# Altium PCB PCB1.PcbDoc
Units mm, origin at the board's own origin, x right, y up, seen from the top; angles counter-clockwise.
Board outline 40 x 99 mm, 2 copper layers (Top Layer, Bottom Layer), stack 1.57 mm thick; 71 components, 47 nets, 155 pads, 6 vias.
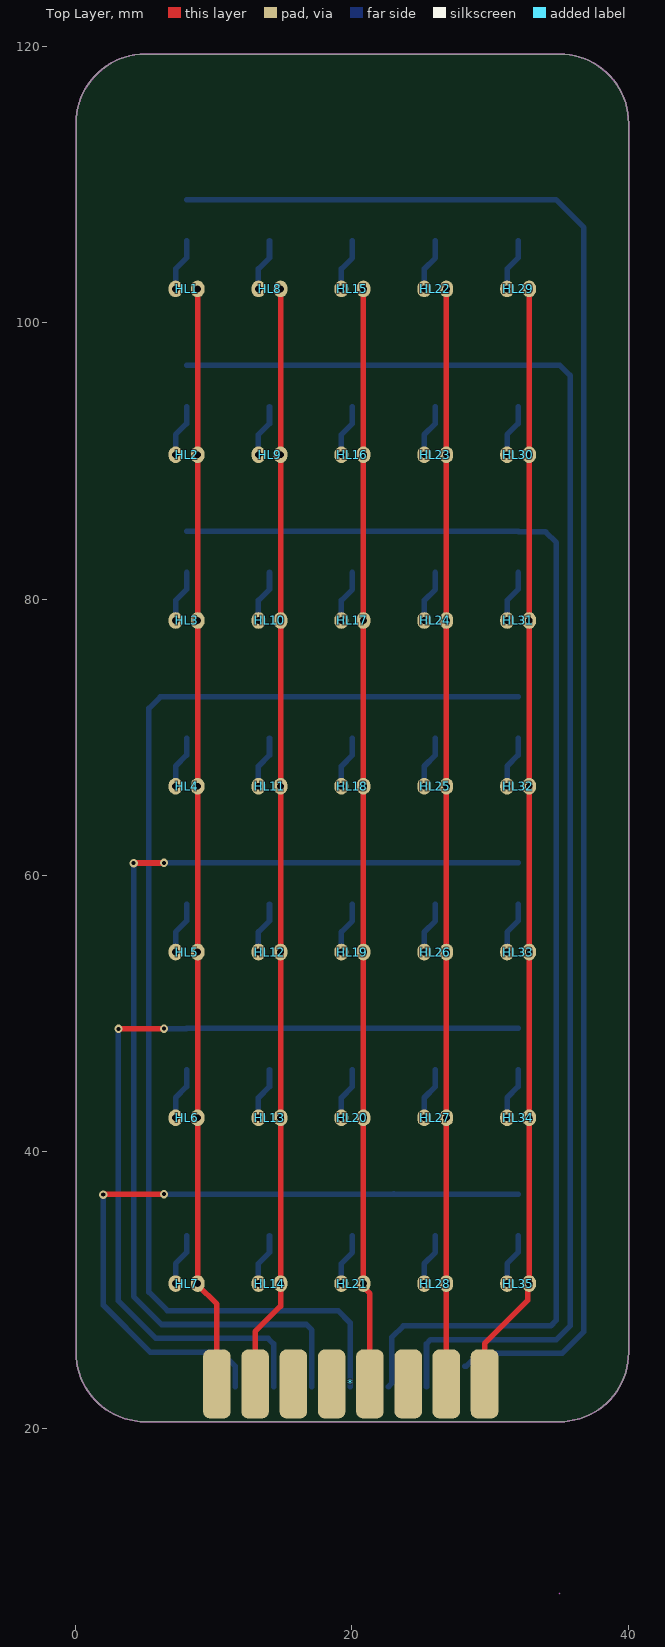
[diagram p0: Top Layer view]
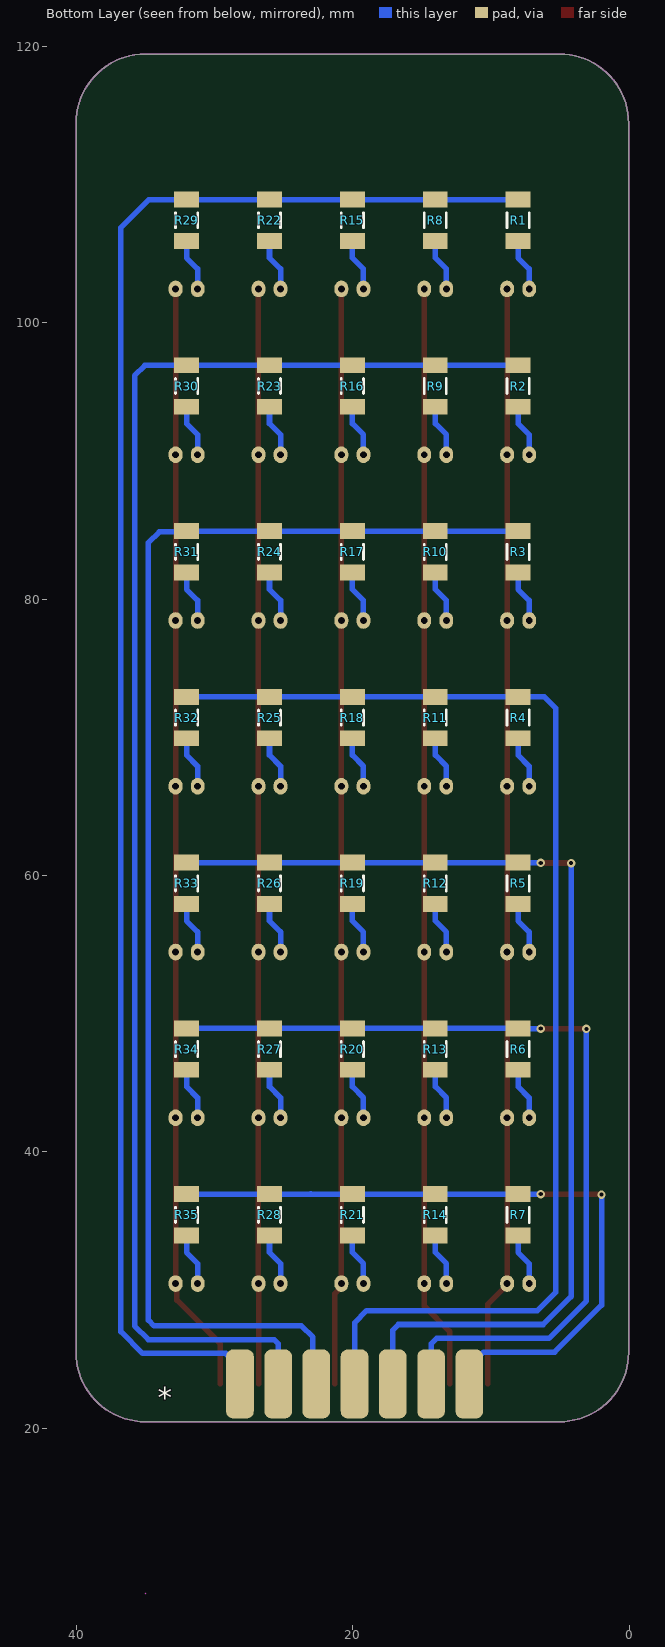
[diagram p1: Bottom Layer view, seen from below]
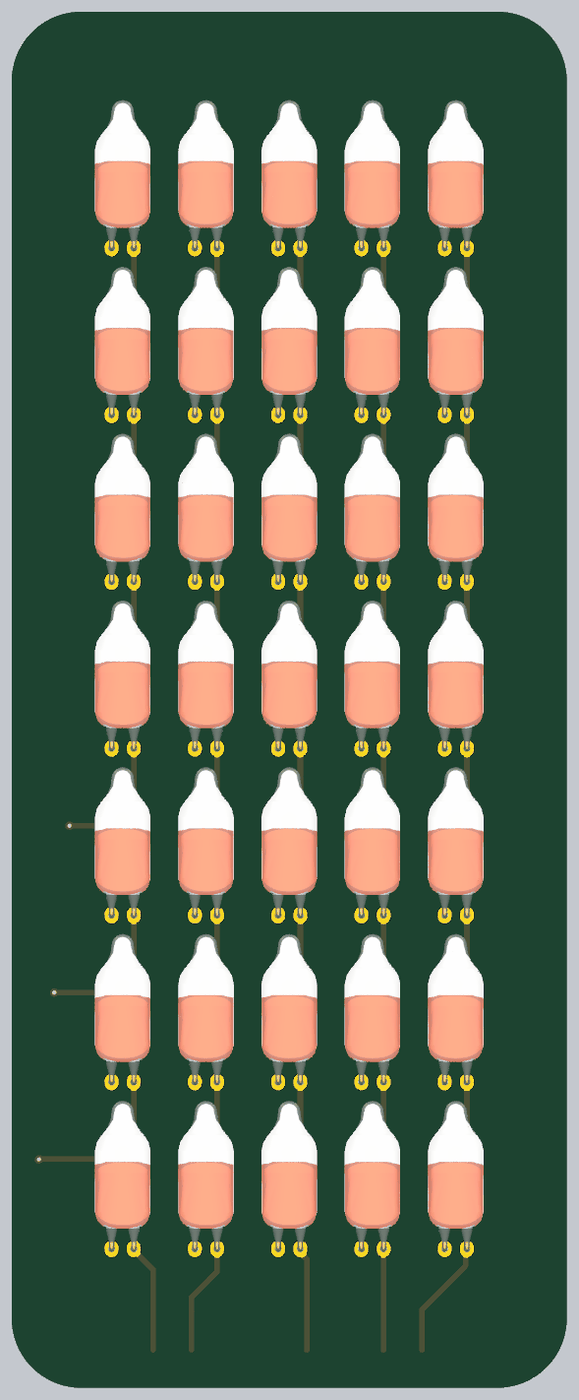
[diagram p2: 3D render of the assembled board from above, using the file's embedded part models]
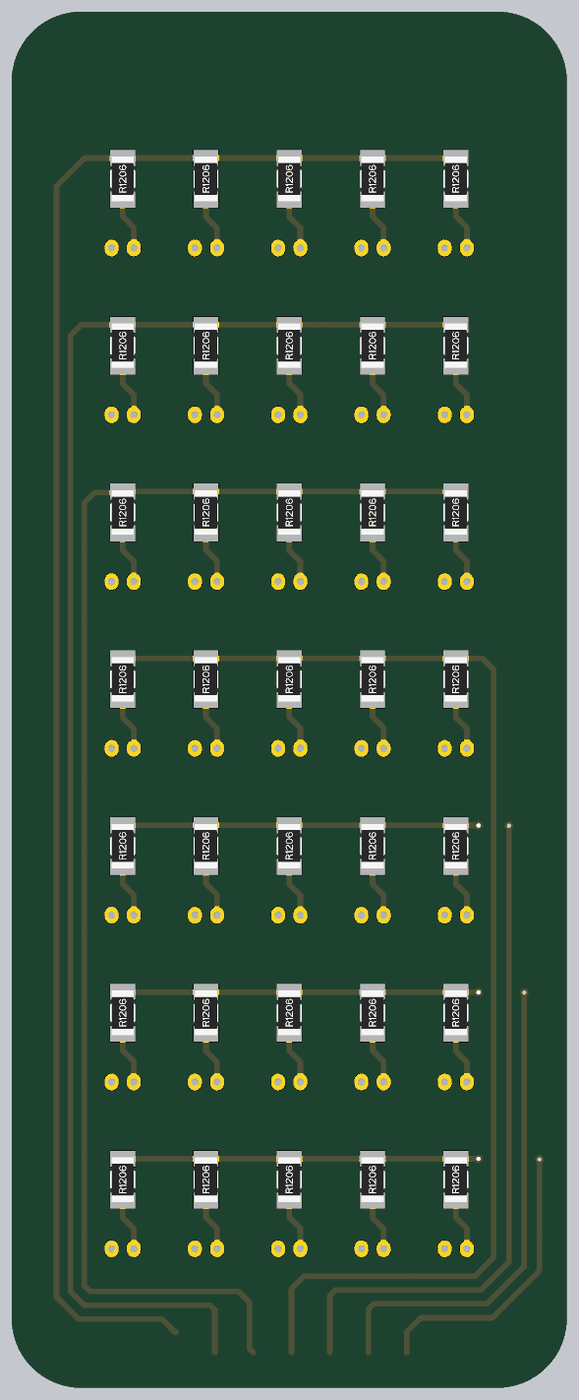
[diagram p3: 3D render of the assembled board from below, using the file's embedded part models]

## Layer stack, top to bottom
Top Solder: solder mask 0.0102, Solder Resist, Dk 3.5
Top Layer: signal copper 0.0356
Dielectric 1: core 1.4986, Core-043, Dk 4.3
Bottom Layer: signal copper 0.0356
Bottom Solder: solder mask 0.0102, Solder Resist, Dk 3.5

## Board outline
5.036,20.464 cw(c5.036,25.464) 0.036,25.464 0.036,114.464 cw(c5.036,114.464) 5.036,119.464 35.036,119.464 cw(c35.036,114.464) 40.036,114.464 40.036,25.464 cw(c35.036,25.464) 35.036,20.464

## Design rules (kind name [scope] priority, off if disabled: settings)
AcuteAngle [All] p1: minimum=6.00000000000000E+0001 checktracksonly=TRUE
Clearance [All] p1: gap=0.6 ignorepadtopadclearanceinfootprint=TRUE except(0.127: Arc-Track Track-Track Track-SMDPad Track-THPad Track-Via Track-Fill Track-Poly Track-Region Track-Text Track-Hole)
DiffPairsRouting [All] p1: maxlimit=0.254 minlimit=0.254 mostfreqgap=0.254 toplayer_minwidth=0.1 toplayer_maxwidth=0.3 toplayer_prefwidth=0.2 bottomlayer_minwidth=0.1 bottomlayer_maxwidth=0.3 bottomlayer_prefwidth=0.2 maxuncoupledlength=12.7
HoleSize [All] p1: absolutevalues=TRUE maxlimit=6.35 minlimit=0.203 maxpercent=80.000 minpercent=20.000
MinimumAnnularRing [All] p1: minimumring=0.13
MinimumSolderMaskSliver [All] p1: minsoldermaskwidth=0.1
PolygonConnect PolygonConnect_6 [All vs IsNamedPolygon('NETDD1_1_L01_P035')] p1: connectstyle=Direct reliefconductorwidth=0.254 reliefentries=4 polygonreliefangle="90 Angle" airgapwidth=0.254
PolygonConnect PolygonConnect_5 [All vs IsNamedPolygon('NETDD1_3_L01_P034')] p2: connectstyle=Direct reliefconductorwidth=0.254 reliefentries=4 polygonreliefangle="90 Angle" airgapwidth=0.254
PolygonConnect PolygonConnect_4 [All vs IsNamedPolygon('NETDD1_3_L01_P034')] p3: connectstyle=Direct reliefconductorwidth=0.254 reliefentries=4 polygonreliefangle="90 Angle" airgapwidth=0.254
PolygonConnect PolygonConnect_3 [All vs IsNamedPolygon('NETDD1_3_L01_P034')] p4: connectstyle=Direct reliefconductorwidth=0.254 reliefentries=4 polygonreliefangle="90 Angle" airgapwidth=0.254
PolygonConnect PolygonConnect_2 [All vs IsNamedPolygon('NETDD1_3_L01_P027')] p5: connectstyle=Direct reliefconductorwidth=0.254 reliefentries=4 polygonreliefangle="90 Angle" airgapwidth=0.254
PolygonConnect PolygonConnect_1 [All vs IsNamedPolygon('NETDD1_3_L01_P027')] p6: connectstyle=Direct reliefconductorwidth=0.254 reliefentries=2 polygonreliefangle="90 Angle" airgapwidth=0.254
PolygonConnect [All] p7: connectstyle=Relief reliefconductorwidth=0.254 reliefentries=4 polygonreliefangle="90 Angle" airgapwidth=0.254
RoutingVias [All] p1: holewidth=0.406 width=0.813 viastyle="Through Hole" minholewidth=0.254 minwidth=0.457 maxholewidth=5.08 maxwidth=7.62
SilkToSolderMaskClearance [IsPad] p1: minsilkscreentomaskgap=0.152 clearancetoexposedcopper=TRUE
SolderMaskExpansion [All] p1: expansion=0.05 istentingtop=FALSE
UnpouredPolygon [All] p1: allowunpoured=TRUE
Width [All] p1: maxlimit=25.4 minlimit=0.102 preferedwidth=0.203
25 further rules are at their usual default settings.

## Components (designator, comment, footprint, x,y, rotation, side; value= is the part's Value field where it differs from the comment)
* "Component_1" "DB-15 on PCB" 20,8.7 r0 top
HL1 "ne-2" ne2-4x10 8.036,102.464 r0 top
HL2 "ne-2" ne2-4x10 8.036,90.464 r0 top
HL3 "ne-2" ne2-4x10 8.036,78.464 r0 top
HL4 "ne-2" ne2-4x10 8.036,66.464 r0 top
HL5 "ne-2" ne2-4x10 8.036,54.464 r0 top
HL6 "ne-2" ne2-4x10 8.036,42.464 r0 top
HL7 "ne-2" ne2-4x10 8.036,30.464 r0 top
HL8 "ne-2" ne2-4x10 14.036,102.464 r0 top
HL9 "ne-2" ne2-4x10 14.036,90.464 r0 top
HL10 "ne-2" ne2-4x10 14.036,78.464 r0 top
HL11 "ne-2" ne2-4x10 14.036,66.464 r0 top
HL12 "ne-2" ne2-4x10 14.036,54.464 r0 top
HL13 "ne-2" ne2-4x10 14.036,42.464 r0 top
HL14 "ne-2" ne2-4x10 14.036,30.464 r0 top
HL15 "ne-2" ne2-4x10 20.036,102.464 r0 top
HL16 "ne-2" ne2-4x10 20.036,90.464 r0 top
HL17 "ne-2" ne2-4x10 20.036,78.464 r0 top
HL18 "ne-2" ne2-4x10 20.036,66.464 r0 top
HL19 "ne-2" ne2-4x10 20.036,54.464 r0 top
HL20 "ne-2" ne2-4x10 20.036,42.464 r0 top
HL21 "ne-2" ne2-4x10 20.036,30.464 r0 top
HL22 "ne-2" ne2-4x10 26.036,102.464 r0 top
HL23 "ne-2" ne2-4x10 26.036,90.464 r0 top
HL24 "ne-2" ne2-4x10 26.036,78.464 r0 top
HL25 "ne-2" ne2-4x10 26.036,66.464 r0 top
HL26 "ne-2" ne2-4x10 26.036,54.464 r0 top
HL27 "ne-2" ne2-4x10 26.036,42.464 r0 top
HL28 "ne-2" ne2-4x10 26.036,30.464 r0 top
HL29 "ne-2" ne2-4x10 32.036,102.464 r0 top
HL30 "ne-2" ne2-4x10 32.036,90.464 r0 top
HL31 "ne-2" ne2-4x10 32.036,78.464 r0 top
HL32 "ne-2" ne2-4x10 32.036,66.464 r0 top
HL33 "ne-2" ne2-4x10 32.036,54.464 r0 top
HL34 "ne-2" ne2-4x10 32.036,42.464 r0 top
HL35 "ne-2" ne2-4x10 32.036,30.464 r0 top
R1 "R-1206 0,25 Вт 510kОм Yageo" R1206 8.036,107.439 r90 bottom
R2 "R-1206 0,25 Вт 510kОм Yageo" R1206 8.036,95.439 r90 bottom
R3 "R-1206 0,25 Вт 510kОм Yageo" R1206 8.036,83.439 r90 bottom
R4 "R-1206 0,25 Вт 510kОм Yageo" R1206 8.036,71.439 r90 bottom
R5 "R-1206 0,25 Вт 510kОм Yageo" R1206 8.036,59.439 r90 bottom
R6 "R-1206 0,25 Вт 510kОм Yageo" R1206 8.036,47.439 r90 bottom
R7 "R-1206 0,25 Вт 510kОм Yageo" R1206 8.036,35.439 r90 bottom
R8 "R-1206 0,25 Вт 510kОм Yageo" R1206 14.036,107.439 r90 bottom
R9 "R-1206 0,25 Вт 510kОм Yageo" R1206 14.036,95.439 r90 bottom
R10 "R-1206 0,25 Вт 510kОм Yageo" R1206 14.036,83.439 r90 bottom
R11 "R-1206 0,25 Вт 510kОм Yageo" R1206 14.036,71.439 r90 bottom
R12 "R-1206 0,25 Вт 510kОм Yageo" R1206 14.036,59.439 r90 bottom
R13 "R-1206 0,25 Вт 510kОм Yageo" R1206 14.036,47.439 r90 bottom
R14 "R-1206 0,25 Вт 510kОм Yageo" R1206 14.036,35.439 r90 bottom
R15 "R-1206 0,25 Вт 510kОм Yageo" R1206 20.036,107.439 r90 bottom
R16 "R-1206 0,25 Вт 510kОм Yageo" R1206 20.036,95.439 r90 bottom
R17 "R-1206 0,25 Вт 510kОм Yageo" R1206 20.036,83.439 r90 bottom
R18 "R-1206 0,25 Вт 510kОм Yageo" R1206 20.036,71.439 r90 bottom
R19 "R-1206 0,25 Вт 510kОм Yageo" R1206 20.036,59.439 r90 bottom
R20 "R-1206 0,25 Вт 510kОм Yageo" R1206 20.036,47.439 r90 bottom
R21 "R-1206 0,25 Вт 510kОм Yageo" R1206 20.036,35.439 r90 bottom
R22 "R-1206 0,25 Вт 510kОм Yageo" R1206 26.036,107.439 r90 bottom
R23 "R-1206 0,25 Вт 510kОм Yageo" R1206 26.036,95.439 r90 bottom
R24 "R-1206 0,25 Вт 510kОм Yageo" R1206 26.036,83.439 r90 bottom
R25 "R-1206 0,25 Вт 510kОм Yageo" R1206 26.036,71.439 r90 bottom
R26 "R-1206 0,25 Вт 510kОм Yageo" R1206 26.036,59.439 r90 bottom
R27 "R-1206 0,25 Вт 510kОм Yageo" R1206 26.036,47.439 r90 bottom
R28 "R-1206 0,25 Вт 510kОм Yageo" R1206 26.036,35.439 r90 bottom
R29 "R-1206 0,25 Вт 510kОм Yageo" R1206 32.036,107.439 r90 bottom
R30 "R-1206 0,25 Вт 510kОм Yageo" R1206 32.036,95.439 r90 bottom
R31 "R-1206 0,25 Вт 510kОм Yageo" R1206 32.036,83.439 r90 bottom
R32 "R-1206 0,25 Вт 510kОм Yageo" R1206 32.036,71.439 r90 bottom
R33 "R-1206 0,25 Вт 510kОм Yageo" R1206 32.036,59.439 r90 bottom
R34 "R-1206 0,25 Вт 510kОм Yageo" R1206 32.036,47.439 r90 bottom
R35 "R-1206 0,25 Вт 510kОм Yageo" R1206 32.036,35.439 r90 bottom

## Footprints (in the part's own frame and the unit in brackets; to place one, negate y for a bottom-side part, rotate by r counter-clockwise, add the part's x,y. Pads: shape width x height; smd on the part's side, far side on the other; paste and mask are expansions set on the pad)
"DB-15 on PCB" [mm]
  rrect50% 2x5 smd: 1(9.6,14.5) 2(6.825,14.5) 3(4.075,14.5) 4(1.305,14.5) 5(-1.465,14.5) 6(-4.235,14.5) 7(-7.005,14.5) 8(-9.775,14.5)
  rrect50% 2x5 smd far side: 9(8.175,14.5) 10(5.4,14.5) 11(2.65,14.5) 12(-0.12,14.5) 13(-2.89,14.5) 14(-5.66,14.5) 15(-8.43,14.5)
  body extent -19.6,0 19.6,14.9, height 5.45
ne2-4x10 [mm]
  oval 1x1.2 hole 0.5: 1(-0.8,0) 2(0.8,0)
  body extent -2,-0.22 2,10.65, height 4.22
R1206 [mm] "Chip Resistor, Body 3.2x1.6mm, Height 1.7mm"
  rect 1.15x1.8 smd: 1(-1.5,0) 2(1.5,0)
  silkscreen extent -0.55,-0.8 0.55,0.8, body extent -1.6,-0.8 1.6,0.8, height 0.6

## Part data
HL1 HL2 HL3 HL4 HL5 HL6 HL7 HL8 HL9 HL10 HL11 HL12 HL13 HL14 HL15 HL16 HL17 HL18 HL19 HL20 HL21 HL22 HL23 HL24 HL25 HL26 HL27 HL28 HL29 HL30 HL31 HL32 HL33 HL34 HL35: "Neon Bulb Indicator Lamps 4mm Red", Current="0,3 mA", Package=4x10, Name="Neon lamp"
R1 R2 R3 R4 R5 R6 R7 R8 R9 R10 R11 R12 R13 R14 R15 R16 R17 R18 R19 R20 R21 R22 R23 R24 R25 R26 R27 R28 R29 R30 R31 R32 R33 R34 R35: library part R1206, Manufacturer=Yageo, Package=R-1206, Power="0,25 Вт", Resistance=510k, Tolerance=5%, Name=Resistor

## Via types
v1: diameter 0.6, hole 0.3, Top Layer to Bottom Layer, tented both sides, 6 vias

## Nets (pads, with @x,y where several pads share a name; then routed paths per layer and width w, separated by ;. In a path a pad name is that pad's centre, name@x,y a point inside that pad or via, vN(x,y) a via of type N, cw(c..) or ccw(c..) an arc to the next point about the centre after c; other vN are vias at no path point)
1: *.8 HL1.2 HL2.2 HL3.2 HL4.2 HL5.2 HL6.2 HL7.2 | length 79.8
  Top Layer w0.4: HL1.2 HL2.2 HL3.2 HL4.2 HL5.2 HL6.2 HL7.2 8.836,30.364 10.225,28.975 *.8
2: *.7 HL8.2 HL9.2 HL10.2 HL11.2 HL12.2 HL13.2 HL14.2 | length 80
  Top Layer w0.4: *.7 12.995,26.995 14.836,28.836 HL14.2 HL13.2 HL12.2 HL11.2 HL10.2 HL9.2 HL8.2
3: *.4 HL15.2 HL16.2 HL17.2 HL18.2 HL19.2 HL20.2 HL21.2 | length 79.5
  Top Layer w0.4: HL15.2 HL16.2 HL17.2 HL18.2 HL19.2 HL20.2 20.836,30.202 21.305,29.733 *.4
4: *.2 HL22.2 HL23.2 HL24.2 HL25.2 HL26.2 HL27.2 HL28.2 | length 79.3
  Top Layer w0.4: *.2 26.83,23.205 26.83,30.459 HL28.2 HL27.2 HL26.2 HL25.2 HL24.2 HL23.2 HL22.2
5: *.1 HL29.2 HL30.2 HL31.2 HL32.2 HL33.2 HL34.2 HL35.2 | length 80.6
  Top Layer w0.4: *.1 29.6,26.122 32.743,29.264 32.743,30.372 HL35.2 HL34.2 HL33.2 HL32.2 HL31.2 HL30.2 HL29.2
A: *.9 R1.2 R8.2 R15.2 R22.2 R29.2 | length 119.2
  Bottom Layer w0.4: R1.2 R8.2 R15.2 R22.2 R29.2 34.761,108.939 36.8,106.9 36.8,26.983 35.221,25.404 29.214,25.404 28.275,24.466 *.9@28.175,24.466
B: *.10 R2.2 R9.2 R16.2 R23.2 R30.2 | length 110.9
  Bottom Layer w0.4: R2.2 R9.2 R16.2 R23.2 R30.2 35.061,96.939 35.8,96.2 35.8,27.397 34.807,26.404 25.704,26.404 25.4,26.1 *.10@25.4,23
C: *.11 R3.2 R10.2 R17.2 R24.2 R31.2 | length 99.5
  Bottom Layer w0.4: R3.2 R10.2 R17.2 R24.2 R31.2 32.088,84.886 34.014,84.886 34.8,84.1 34.8,27.811 34.393,27.404 23.724,27.404 22.9,26.58 22.9,23.25 *.11@22.65,23
D: *.12 R4.2 R11.2 R18.2 R25.2 R32.2 | length 89.5
  Bottom Layer w0.4: *.12@19.88,23 19.88,27.62 19,28.5 6.643,28.5 5.3,29.843 5.3,72.1 6.139,72.939 R4.2 R11.2 R18.2 R25.2 R32.2
E: *.13 R5.2 R12.2 R19.2 R26.2 R33.2 | length 77.2
  Top Layer w0.4: v1(4.2,60.9) 4.21,60.91 6.39,60.91 v1(6.4,60.919)
  Bottom Layer w0.4: v1(4.2,60.9) 4.2,29.528 6.228,27.5 16.7,27.5 17.11,27.09 *.13@17.11,23 ; v1(6.4,60.919) 8.016,60.919 R5.2 R12.2 R19.2 R26.2 R33.2
F: *.14 R6.2 R13.2 R20.2 R27.2 R34.2 | length 64.3
  Top Layer w0.4: v1(3.1,48.9) 6.381,48.9 v1(6.4,48.919)
  Bottom Layer w0.4: v1(3.1,48.9) 3.1,29.214 5.814,26.5 13.94,26.5 14.34,26.1 *.14@14.34,23 ; v1(6.4,48.919) 8.016,48.919 R6.2 R13.2 R20.2 R27.2 R34.2
G: *.15 R7.2 R14.2 R21.2 R28.2 R35.2 | length 50.9
  Top Layer w0.4: v1(2,36.9) 2.019,36.919 6.381,36.919 v1(6.4,36.939)
  Bottom Layer w0.4: v1(2,36.9) 2,28.9 5.4,25.5 10.536,25.5 11.57,24.466 *.15@11.57,23 ; v1(6.4,36.939) R7.2 R14.2 R21.2 23.036,36.939 ; 23.036,36.964 23.036,36.939 ; R35.2 R28.2 23.036,36.939
NetHL1_1: HL1.1 R1.1 | length 3.8
  Bottom Layer w0.4: HL1.1 7.236,103.914 8.036,104.714 R1.1
NetHL2_1: HL2.1 R2.1 | length 3.8
  Bottom Layer w0.4: HL2.1 7.236,91.914 8.036,92.714 R2.1
NetHL3_1: HL3.1 R3.1 | length 3.8
  Bottom Layer w0.4: HL3.1 7.236,79.914 8.036,80.714 R3.1
NetHL4_1: HL4.1 R4.1 | length 3.8
  Bottom Layer w0.4: HL4.1 7.236,67.914 8.036,68.714 R4.1
NetHL5_1: HL5.1 R5.1 | length 3.8
  Bottom Layer w0.4: HL5.1 7.236,55.914 8.036,56.714 R5.1
NetHL6_1: HL6.1 R6.1 | length 3.8
  Bottom Layer w0.4: HL6.1 7.236,43.914 8.036,44.714 R6.1
NetHL7_1: HL7.1 R7.1 | length 3.8
  Bottom Layer w0.4: HL7.1 7.236,31.914 8.036,32.714 R7.1
NetHL8_1: HL8.1 R8.1 | length 3.8
  Bottom Layer w0.4: HL8.1 13.236,103.914 14.036,104.714 R8.1
NetHL9_1: HL9.1 R9.1 | length 3.8
  Bottom Layer w0.4: HL9.1 13.236,91.914 14.036,92.714 R9.1
NetHL10_1: HL10.1 R10.1 | length 3.8
  Bottom Layer w0.4: HL10.1 13.236,79.914 14.036,80.714 R10.1
NetHL11_1: HL11.1 R11.1 | length 3.8
  Bottom Layer w0.4: HL11.1 13.236,67.914 14.036,68.714 R11.1
NetHL12_1: HL12.1 R12.1 | length 3.8
  Bottom Layer w0.4: HL12.1 13.236,55.914 14.036,56.714 R12.1
NetHL13_1: HL13.1 R13.1 | length 3.8
  Bottom Layer w0.4: HL13.1 13.236,43.914 14.036,44.714 R13.1
NetHL14_1: HL14.1 R14.1 | length 3.8
  Bottom Layer w0.4: HL14.1 13.236,31.914 14.036,32.714 R14.1
NetHL15_1: HL15.1 R15.1 | length 3.8
  Bottom Layer w0.4: HL15.1 19.236,103.914 20.036,104.714 R15.1
NetHL16_1: HL16.1 R16.1 | length 3.8
  Bottom Layer w0.4: HL16.1 19.236,91.914 20.036,92.714 R16.1
NetHL17_1: HL17.1 R17.1 | length 3.8
  Bottom Layer w0.4: HL17.1 19.236,79.914 20.036,80.714 R17.1
NetHL18_1: HL18.1 R18.1 | length 3.8
  Bottom Layer w0.4: HL18.1 19.236,67.914 20.036,68.714 R18.1
NetHL19_1: HL19.1 R19.1 | length 3.8
  Bottom Layer w0.4: HL19.1 19.236,55.914 20.036,56.714 R19.1
NetHL20_1: HL20.1 R20.1 | length 3.8
  Bottom Layer w0.4: HL20.1 19.236,43.914 20.036,44.714 R20.1
NetHL21_1: HL21.1 R21.1 | length 3.8
  Bottom Layer w0.4: HL21.1 19.236,31.914 20.036,32.714 R21.1
NetHL22_1: HL22.1 R22.1 | length 3.8
  Bottom Layer w0.4: HL22.1 25.236,103.914 26.036,104.714 R22.1
NetHL23_1: HL23.1 R23.1 | length 3.8
  Bottom Layer w0.4: HL23.1 25.236,91.914 26.036,92.714 R23.1
NetHL24_1: HL24.1 R24.1 | length 3.8
  Bottom Layer w0.4: HL24.1 25.236,79.914 26.036,80.714 R24.1
NetHL25_1: HL25.1 R25.1 | length 3.8
  Bottom Layer w0.4: HL25.1 25.236,67.914 26.036,68.714 R25.1
NetHL26_1: HL26.1 R26.1 | length 3.8
  Bottom Layer w0.4: HL26.1 25.236,55.914 26.036,56.714 R26.1
NetHL27_1: HL27.1 R27.1 | length 3.8
  Bottom Layer w0.4: HL27.1 25.236,43.914 26.036,44.714 R27.1
NetHL28_1: HL28.1 R28.1 | length 3.8
  Bottom Layer w0.4: HL28.1 25.236,31.914 26.036,32.714 R28.1
NetHL29_1: HL29.1 R29.1 | length 3.8
  Bottom Layer w0.4: HL29.1 31.236,103.914 32.036,104.714 R29.1
NetHL30_1: HL30.1 R30.1 | length 3.8
  Bottom Layer w0.4: HL30.1 31.236,91.914 32.036,92.714 R30.1
NetHL31_1: HL31.1 R31.1 | length 3.8
  Bottom Layer w0.4: HL31.1 31.236,79.914 32.036,80.714 R31.1
NetHL32_1: HL32.1 R32.1 | length 3.8
  Bottom Layer w0.4: HL32.1 31.236,67.914 32.036,68.714 R32.1
NetHL33_1: HL33.1 R33.1 | length 3.8
  Bottom Layer w0.4: HL33.1 31.236,55.914 32.036,56.714 R33.1
NetHL34_1: HL34.1 R34.1 | length 3.8
  Bottom Layer w0.4: HL34.1 31.236,43.914 32.036,44.714 R34.1
NetHL35_1: HL35.1 R35.1 | length 3.8
  Bottom Layer w0.4: HL35.1 31.236,31.914 32.036,32.714 R35.1
pads on no net: *.3 *.5 *.6

## Keep-outs
Keep-Out Layer:
  lines w0.1: 35,8 35.036,8.036 ; 40.036,114.464 40.036,25.464 cw(c35.036,25.464) 35.036,20.464 5.036,20.464 cw(c5.036,25.464) 0.036,25.464 0.036,114.464 cw(c5.036,114.464) 5.036,119.464 35.036,119.464 cw(c35.036,114.464) 40.036,114.464